# Altium PCB 皮肤热疗.PcbDoc
Units mil, origin at the board's own origin, x right, y up, seen from the top; angles counter-clockwise.
Board outline 1403.03 x 1893.03 mil, 2 copper layers (Top Layer, Bottom Layer); 64 components, 35 nets, 236 pads, 45 vias.
Unrouted connection lines stored in the file: 6.
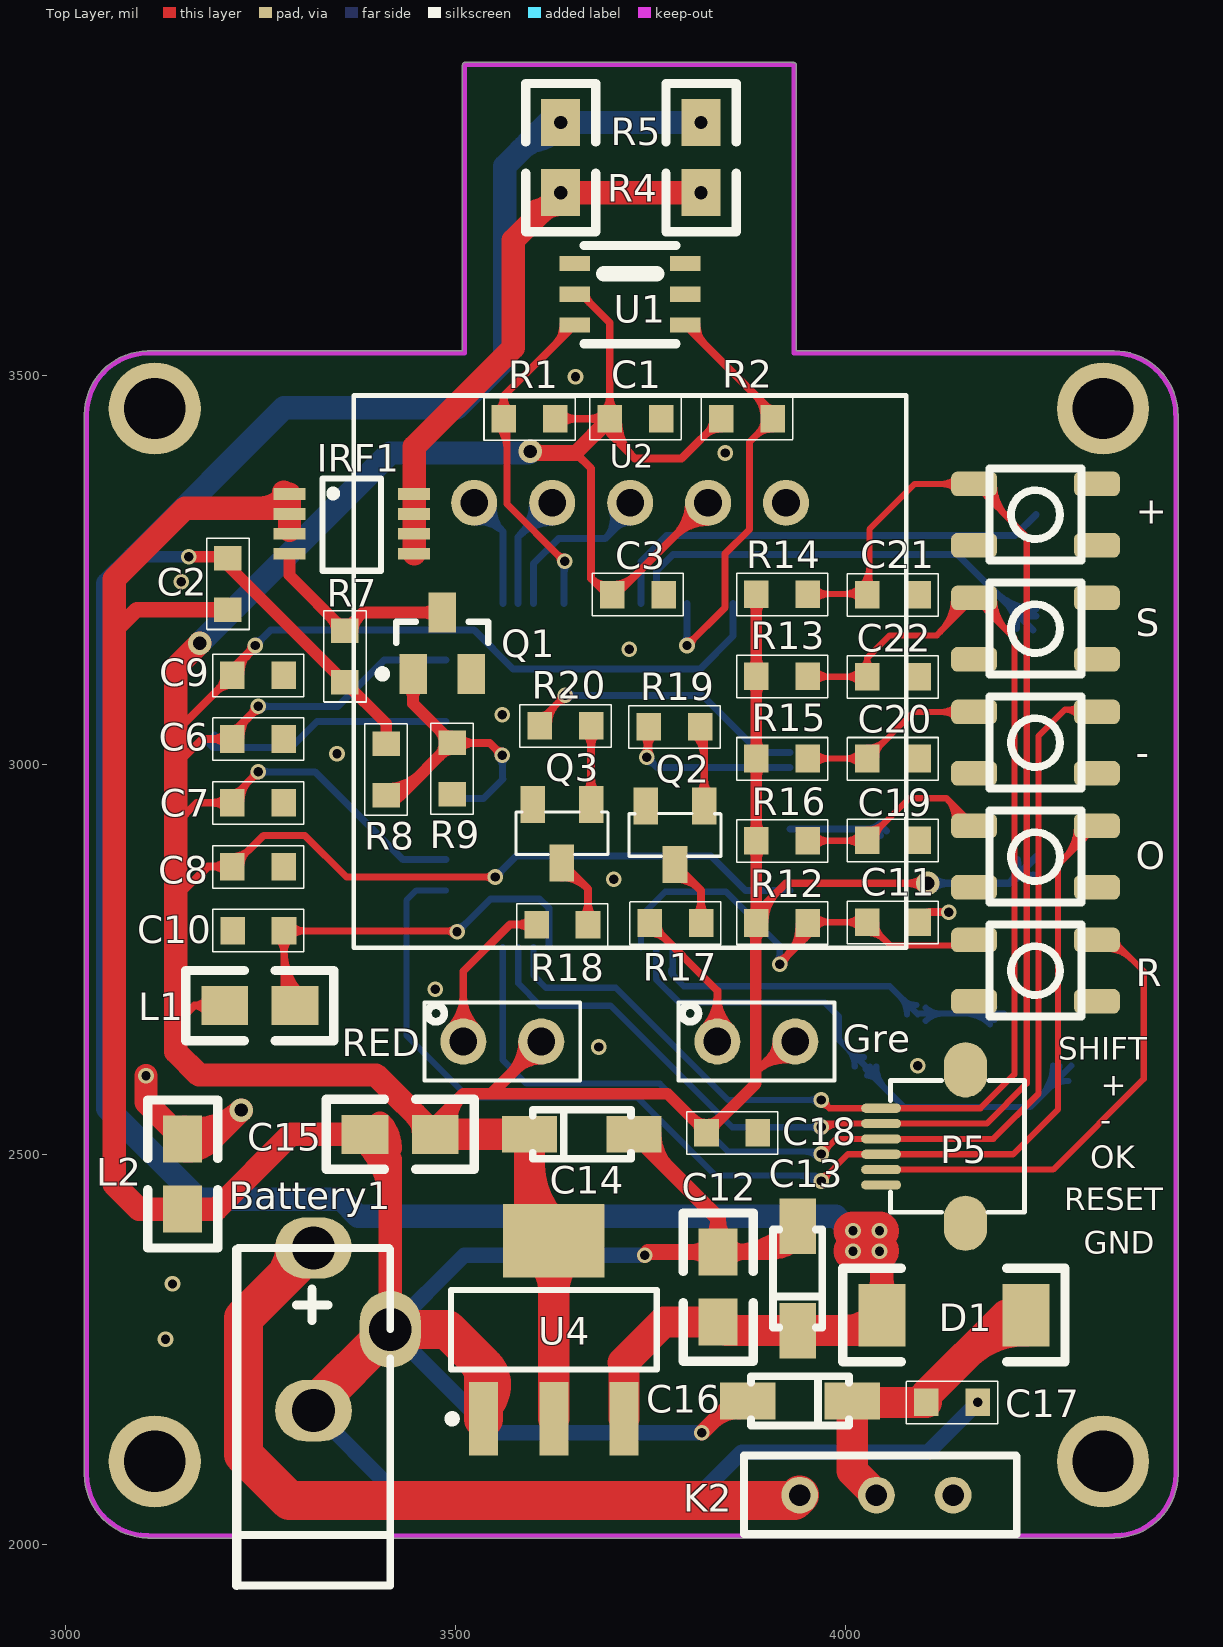
[diagram p0: Top Layer view]
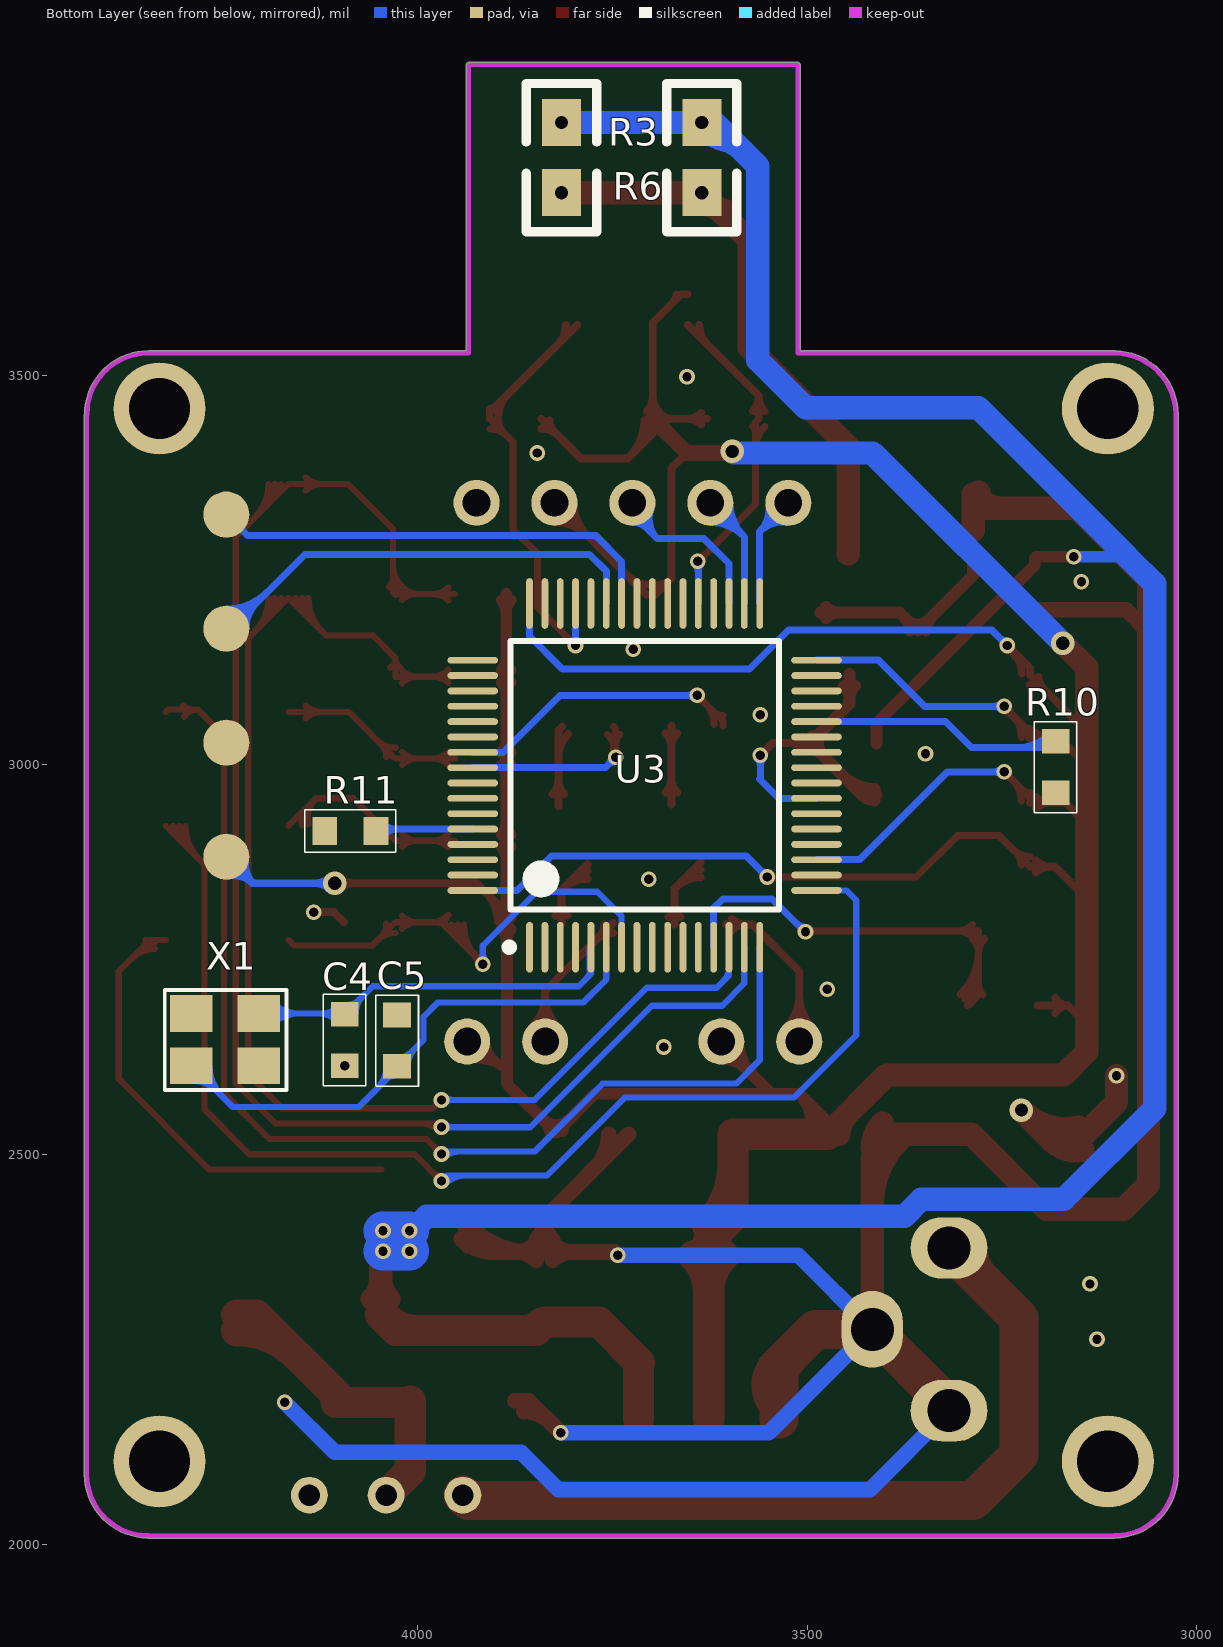
[diagram p1: Bottom Layer view, seen from below]

## Layer stack, top to bottom
Top Solder: solder mask 0.4, Solder Resist, Dk 3.5
Top Layer: signal copper 1.4
Dielectric1: dielectric 12.6, FR-4, Dk 4.8
Bottom Layer: signal copper 1.4
Bottom Solder: solder mask 0.4, Solder Resist, Dk 3.5

## Board outline
3023.99,2090 ccw(c3105.74,2090) 3104.49,2008.25 ccw(c3105.74,2011) 3105.74,2007.98 4345.26,2007.98 ccw(c4345.26,2011) 4346.51,2008.25 ccw(c4345.26,2090) 4427.02,2090 4427.02,3449.26 ccw(c4424,3449.26) 4426.75,3450.51 ccw(c4345,3449.26) 4345,3531.01 3937.01,3531.01 3937.01,3898 ccw(c3934,3898) 3933,3900.84 ccw(c3932,3898) 3932,3901.01 3512,3901.01 ccw(c3512,3898) 3508.99,3898 3508.99,3531.01 3105.74,3531.01 ccw(c3105.74,3528) 3104.49,3530.75 ccw(c3105.74,3449) 3023.99,3449

## Design rules (kind name [scope] priority, off if disabled: settings)
Clearance [All] p1: gap=7
HoleSize [All] p1: absolutevalues=TRUE maxlimit=500 minlimit=1 maxpercent=80.000 minpercent=20.000
MinimumSolderMaskSliver [All] p1: minsoldermaskwidth=0
PolygonConnect [All] p1: connectstyle=Relief reliefconductorwidth=10 reliefentries=4 polygonreliefangle="90 Angle" airgapwidth=10
RoutingVias [All] p1: holewidth=28 width=50 viastyle="Through Hole" minholewidth=28 minwidth=50 maxholewidth=28 maxwidth=50
SilkToSilkClearance [All] p1: silktosilkclearance=0
SilkToSolderMaskClearance [IsPad] p1: minsilkscreentomaskgap=0 clearancetoexposedcopper=TRUE
SolderMaskExpansion [All] p1: expansion=2
Width [All] p1: maxlimit=100 minlimit=8 preferedwidth=10
26 further rules are at their usual default settings.

## Classes and differential pairs
component class U_UI: + - C18 C19 C20 C21 C22 Green O Q2 Q3 R13 R14 R15 R16 R17 R18 R19 R20 RED S
component class U_Power: Battery1 C12 C13 C14 C15 C16 C17 D1 K2 U4
component class U_MCU: C4 C5 C6 C7 C8 C9 C10 C11 L1 R R10 R11 R12 U3 X1
component class U_LCD: C3 U2
component class U_Heater: C1 C2 IRF1 Q1 R1 R2 R3 R4 R5 R6 R7 R8 R9 U1
component class Top: L2 P5

## Components (designator, comment, footprint, x,y, rotation, side; value= is the part's Value field where it differs from the comment)
+ "按键" mini按键 4185,3380 r0 top (schematic designator K4)
- "按键" mini按键 4185,3087.5 r0 top (schematic designator K5)
Battery1 "CON3" J-SOURCE-micro 3436,2262 r270 top
C1 "Capacitor-0603" 0603 3698,3444 r0 top
C2 "Capacitor-0603" 0603 3208,3265 r270 top
C3 "Capacitor-0603" 0603 3701,3218 r0 top
C4 "Capacitor-0805" 0603 4093,2614 r90 bottom
C5 "Capacitor-0805" 0603 4026,2679 r270 bottom
C6 "Capacitor-0603" 0603 3279.85,3033.14 r180 top
C7 "Capacitor-0603" 0603 3279.85,2951.28 r180 top
C8 "Capacitor-0603" 0603 3279.85,2869.42 r180 top
C9 "Capacitor-0603" 0603 3279.85,3115 r180 top
C10 "Capacitor-0603" 0603 3214,2787 r0 top
C11 "Capacitor-0603" 0603 4094,2798 r180 top
C12 "Capacitor-0805" 0805 3837,2375 r270 top
C13 "电解电容" 钽电容1206（A3216） 3939,2278 r90 top
C14 "电解电容" 钽电容1206（A3216） 3599,2526 r0 top
C15 "Capacitor-0805" 0805 3384,2526 r0 top
C16 "电解电容" 钽电容1206（A3216） 4005,2184 r180 top
C17 "Capacitor-0603" 0603 4170,2182 r180 top
C18 "Capacitor-0603" 0603 3888,2528 r180 top
C19 "Capacitor-0603" 0603 4094,2903 r180 top
C20 "Capacitor-0603" 0603 4094,3008 r180 top
C21 "Capacitor-0603" 0603 4094,3218 r180 top
C22 "Capacitor-0603" 0603 4094,3113 r180 top
D1 "1N5817" 1808 4232,2294 r180 top
Gre "LED" 外插小灯 3936,2645 r180 top (schematic designator LED1)
IRF1 "IRF7601-1" IRF7601_Micro 3367,3308 r0 top
K2 "K400" SS-12D01-edit 4040,2063 r0 top
L1 "Inductor" 0805 3294,2691 r180 top
L2 "Inductor" 0805 3150,2520 r270 top
O "按键" mini按键 4185,2941.25 r0 top (schematic designator K6)
P5 "面板按键接口" 软排线插座6P-0.5mm 4046,2461 r90 top
Q1 "MOSFET_N" MOSFET_N 3483,3156 r90 top
Q2 "BC847" BC847B 3819,2947 r270 top
Q3 "BC847" BC847B 3674,2949 r270 top
R "按键" mini按键 4185,2795 r0 top (schematic designator K1)
R1 "Resistor-0603" 0603 3628,3444 r180 top
R2 "Resistor-0603" 0603 3841,3444 r0 top
R3 "Resistor-0805" 0805 3635,3734 r90 bottom
R4 "Resistor-0805" 0805 3635,3734 r90 top
R5 "Resistor-0805" 0805 3815,3734 r90 top
R6 "Resistor-0805" 0805 3815,3734 r90 bottom
R7 "Resistor-0603" 0603 3358,3172 r270 top
R8 "Resistor-0603" 0603 3411,2961 r90 top
R9 "Resistor-0603" 0603 3496,2962 r90 top
R10 "Resistor-0603" 0603 3181,2964 r90 bottom
R11 "Resistor-0603" 0603 4119,2915 r180 bottom
R12 "Resistor-0603" 0603 3952,2797 r180 top
R13 "Resistor-0603" 0603 3952,3113.5 r180 top
R14 "Resistor-0603" 0603 3952,3219 r180 top
R15 "Resistor-0603" 0603 3952,3008 r180 top
R16 "Resistor-0603" 0603 3952,2902.5 r180 top
R17 "Resistor-0603" 0603 3815,2797 r180 top
R18 "Resistor-0603" 0603 3670,2795 r180 top
R19 "Resistor-0603" 0603 3814,3049 r180 top
R20 "Resistor-0603" 0603 3674,3050 r180 top
RED "LED" 外插小灯 3610,2645 r180 top (schematic designator LED2)
S "按键" mini按键 4185,3233.75 r0 top (schematic designator K3)
U1 "SHIT21" SHT21 3653,3643 r0 top
U2 "0.49OLED" 0.49OLED 3724,3336 r0 top
U3 "STM32F103RBT6" STM32F103RBT6 3856,2766 r90 bottom
U4 "AMS1117-3.3" AMS1117-3.3(SOT-23) 3536,2161 r0 top
X1 "3225无源晶振" 3225无源晶振 4290,2614 r180 bottom

## Footprints (in the part's own frame and the unit in brackets; to place one, negate y for a bottom-side part, rotate by r counter-clockwise, add the part's x,y. Pads: shape width x height; smd on the part's side, far side on the other; paste and mask are expansions set on the pad)
0.49OLED [mm]
  round 1.5 hole 0.9: 1(5.08,0) 2(2.54,0) 3(0,0) 4(-2.54,0) 5(-5.08,0)
  silkscreen extent -9,-14.5 9,3.5
0603 [mm] "0603"
  rect 0.8x0.9 smd: 1(0,0) 2(1.676,0)
  silkscreen extent -0.65,-0.69 2.32,0.7, body extent 0.1,-0.4 1.7,0.4, height 0.5
0805 [mil]
  rect 60x50 smd: 1(0,0) 2(90,0)
  silkscreen extent -50,-45 140,45
1808 [mil]
  rect 60x80 smd: 1(0,0) 2(185,0)
  silkscreen extent -50,-60 235,60
3225无源晶振 [mm]
  rect 1.4x1.2 smd: 1(0,0) 2(2.2,0) 3(2.2,1.7) 4(0,1.7)
  silkscreen extent -0.86,-0.79 3.1,2.46
AMS1117-3.3(SOT-23) [mm]
  rect 0.95x2.4 smd: 1(0,0) 2(2.29,0) 3(4.58,0)
  rect 3.3x2.4 smd: 2(2.29,5.8)
  silkscreen extent -1.15,-0.12 5.65,4.2, body extent -1.06,1.04 5.65,4.75, height 1.8
BC847B [mm] "SOT23, 3-Leads, Body 2.90x2.45mm, Pitch 0.95mm, IPC Medium Density"
  rect 1.2x0.8 smd: 1(0,-1.9) 2(0,0) 3(1.9,-0.95)
  silkscreen extent 0.24,-2.45 1.63,0.55, body extent 0.25,-2.45 1.65,0.55, height 1.1
IRF7601_Micro [mm]
  rect 1.04x0.38 smd: 1(-2.032,1) 2(-2.032,0.35) 3(-2.032,-0.3) 4(-2.032,-0.95) 5(2.032,-0.95) 6(2.032,-0.3) 7(2.032,0.35) 8(2.032,1)
  silkscreen extent -0.95,-1.5 0.95,1.5
J-SOURCE-micro [mm]
  oval 2.5x2 hole 1.4: 1(-0.35,-0.5)
  oval 2x2.5 hole 1.4: 2(2.3,-3) 3(-3,-3)
  silkscreen extent -3,-5.5 8,-0.5
mini按键 [mm]
  rrect50% 1.5x0.8 smd: 1(-0.5,-0.5) 1(3.5,-0.5) 2(-0.5,-2.5) 2(3.5,-2.5)
  silkscreen extent 0,-3 3,0
MOSFET_N [mm]
  rect 1.3x0.9 smd: 1(-1,0.95) 2(-1,-0.95) 3(1,0)
  silkscreen extent -1.12,-1.5 0.7,2.07, body extent -0.7,-1.52 0.7,1.52, height 1.1
SHT21 [mm]
  rect 1x0.5 smd: 1(0,0) 2(3.6,0) 3(0,-1) 4(3.6,-1) 5(0,-2) 6(3.6,-2)
  silkscreen extent 0.3,-2.62 3.3,0.58
SS-12D01-edit [mm]
  round 1.2 hole 0.7: 1(-2.5,0) 2(0,0) 3(2.5,0)
  silkscreen extent -4.32,-1.27 4.57,1.29
STM32F103RBT6 [mm]
  oval 1.65x0.22 smd: 1(0,0) 2(0,-0.5) 3(0,-1) 4(0,-1.5) 5(0,-2) 6(0,-2.5) 7(0,-3) 8(0,-3.5) 9(0,-4) 10(0,-4.5) 11(0,-5) 12(0,-5.5) 13(0,-6) 14(0,-6.5) 15(0,-7) 16(0,-7.5) 33(11.2,-7.5) 34(11.2,-7) 35(11.2,-6.5) 36(11.2,-6) 37(11.2,-5.5) 38(11.2,-5) 39(11.2,-4.5) 40(11.2,-4) 41(11.2,-3.5) 42(11.2,-3) 43(11.2,-2.5) 44(11.2,-2) 45(11.2,-1.5) 46(11.2,-1) 47(11.2,-0.5) 48(11.2,0)
  oval 0.22x1.65 smd: 17(1.85,-9.35) 18(2.35,-9.35) 19(2.85,-9.35) 20(3.35,-9.35) 21(3.85,-9.35) 22(4.35,-9.35) 23(4.85,-9.35) 24(5.35,-9.35) 25(5.85,-9.35) 26(6.35,-9.35) 27(6.85,-9.35) 28(7.35,-9.35) 29(7.85,-9.35) 30(8.35,-9.35) 31(8.85,-9.35) 32(9.35,-9.35) 49(9.35,1.85) 50(8.85,1.85) 51(8.35,1.85) 52(7.85,1.85) 53(7.35,1.85) 54(6.85,1.85) 55(6.35,1.85) 56(5.85,1.85) 57(5.35,1.85) 58(4.85,1.85) 59(4.35,1.85) 60(3.85,1.85) 61(3.35,1.85) 62(2.85,1.85) 63(2.35,1.85) 64(1.85,1.85)
  silkscreen extent -0.12,-8.13 9.97,0.78, body extent 0.6,-8.75 10.6,1.25, height 1.6
外插小灯 [mm]
  round 1.5 hole 0.9: 1(0,0) 2(2.54,0)
  silkscreen extent -1.27,-1.27 3.81,1.27
软排线插座6P-0.5mm [mm]
  oval 1.8x1.4 smd mask+0.051: 0(-1.25,-2.75) 0(3.75,-2.75)
  oval 0.3x1.3 smd mask+0.051: 1(0,0) 2(0.5,0) 3(1,0) 4(1.5,0) 5(2,0) 6(2.5,0)
  silkscreen extent -0.89,-4.67 3.4,-0.3
钽电容1206（A3216） [mm]
  rect 1.8x1.2 smd: 1(3.3,0) 2(-0.1,0)
  silkscreen extent 0,-0.8 3.2,0.8

## Part data
Battery1: "Connector"
C4 C5: library part Capacitor-0
D1: library part "DIODE SCHOTTKY", "Schottky Diode"
IRF1: library part Component_1, "IRF7601"
K2: library part CON3, "Connector"
P5: library part "Header 6", "Header, 6-Pin"

## Free pads (board coordinates)
  round 59.06 smd far side: 0(4245,3321) 1(4245,3174.67) 2(4245,3028.33) 3(4245,2882)
  round 118.11 hole 78.74: 0(4330.71,2106.3) 1(3114.17,2106.3) 1(3114.17,3457) 1(4330.71,3457)

## Via types
v1: diameter 20, hole 12, Top Layer to Bottom Layer, 37 vias
v2: diameter 30, hole 17, Top Layer to Bottom Layer, 8 vias

## Nets (pads, with @x,y where several pads share a name; then routed paths per layer and width w, separated by ;. In a path a pad name is that pad's centre, name@x,y a point inside that pad or via, vN(x,y) a via of type N, cw(c..) or ccw(c..) an arc to the next point about the centre after c; other vN are vias at no path point)
AGND: Battery1.1 Battery1.2 C2.2 C12.1 C13.1 C14.1 C15.1 C16.1 C17.1 IRF1.1 IRF1.2 IRF1.3 L2.2 U4.1 | length 5317.6
  Top Layer w20: 3062,3170 3091,3199 C2.2 ; C14.1 3837,2417.92 C12.1 ; 3752.66,2375 ccw(c3752.66,2361.34) v1(3743,2371) 3747,2375 C12.1 ; C14.1@3754.35,2526 ccw(c3815.76,2526) 3772.34,2482.58 ; v1(3816,2143) 3857,2184 C16.1 ; C12.1@3826.39,2364.39 ccw(c3800.79,2338.79) 3800.79,2375 ccw(c3800.79,2411.21) C12.1@3826.39,2385.61 ; C12.1@3826.39,2390.61 ccw(c3800.79,2416.21) 3837,2416.21 ccw(c3873.21,2416.21) C12.1@3847.61,2390.61 ; 3829.31,2156.31 cw(c3863.27,2122.36) C16.1@3863.27,2170.38 ; C12.1@3847.61,2364.39 cw(c3873.21,2338.79) 3873.21,2375 cw(c3873.21,2411.21) C12.1@3847.61,2385.61 ; C12.1@3855.15,2375 ccw(c3855.15,2479.96) C13.1@3929.37,2405.74 ; 3903.43,2375 ccw(c3903.43,2431.68) C13.1@3943.51,2391.6 ; C13.1@3935.52,2382.94 ccw(c3927.7,2353.38) 3906.08,2375 ; C13.1 3906.08,2375 ; C12.1 3906.08,2375
  Top Layer w30: 3247.81,3329 ccw(c3247.81,3373.56) IRF1.1@3279.33,3342.05 ; IRF1.2@3274.73,3329 cw(c3274.73,3322.5) IRF1.2@3279.33,3327.1 ; IRF1.1@3279.92,3349.91 ccw(c3304.36,3341.14) IRF1.2@3286,3322.78 ; IRF1.3@3287,3301.1 IRF1.2 ; C15.1@3381.93,2518.93 cw(c3298.91,2435.91) 3416.32,2435.91 ; C15.1@3387.75,2516.08 cw(c3383.67,2483.69) 3416.32,2483.69 ; C15.1@3399,2526 ccw(c3435.21,2526) 3409.61,2500.39 ; C15.1@3403.14,2540.14 cw(c3371.34,2508.34) 3416.32,2508.34 ; Battery1.1 3416.32,2493.68 C15.1 3289,2526 3193,2430 L2.2 3094,2430 3062,2462 3062,3170 3062,3238 3153,3329 3279.78,3329 IRF1.2@3286,3322.78 ; IRF1.2@3286,3322.78 IRF1.2 ; IRF1.2@3286,3322.78 3286,3320.78 IRF1.2 ; IRF1.2@3286,3322.78 3286,3346.37 IRF1.1 IRF1.2
  Top Layer w50: Battery1.2 3317.89,2177.35 Battery1.1 3489.22,2275.78 3536,2229 ; 3518.85,2246.15 cw(c3462.25,2189.54) U4.1@3542.3,2189.54 ; U4.1 3536,2229 ; U4.1@3541.43,2186.35 ccw(c3511.17,2204.17) 3536,2229
  Bottom Layer w20: Battery1.2 3419.34,2070 3819,2070 3867,2118 4106,2118 v1(4170,2182) ; v1(3743,2371) 3511.54,2371 Battery1.1 3549.1,2143 v1(3816,2143)
BOOT0: R11.2 U3.60 | length 167.9
  Bottom Layer w9: U3.60 4050.43,2917.57 R11.2 ; 4024.38,2917.57 cw(c4024.38,2888.35) R11.2@4045.05,2909.01 ; 4027.31,2917.57 ccw(c4027.31,2942.66) R11.2@4045.05,2924.92
BOOT1: R10.2 U3.28 | length 392.5
  Bottom Layer w9: R10.2 3189,3022 3289,3022 3322.37,3055.37 U3.28 ; R10.2@3184.56,3031.59 ccw(c3207.71,3054.74) 3207.71,3022 ; R10.2@3190.92,3037.95 ccw(c3229.44,3076.47) 3229.44,3022
GND: +.2 -.2 C1.2 C3.2 C4.1 C5.1 C6.1 C7.1 C8.1 C9.1 C10.1 C11.1 C18.1 C19.1 C20.1 C21.1 C22.1 L2.1 O.2 P5.1 pad.2 Q1.2 Q2.1 Q3.1 R9.1 R10.1 R11.1 R.2 S.2 U1.4 U2.1 U3.12 U3.18 U3.31 U3.47 U3.63 X1.2 X1.4 | length 357.3
  Top Layer w10: C11.1 4107,2811 v1(4133,2811)
  Top Layer w30: v1(3103,2601) 3103,2567 L2.1 3188,2520 v2(3225,2557) cw(c3167.7,2614.3) L2.1@3151.94,2534.81 ; L2.1@3146.11,2505.38 ccw(c3154.56,2548) 3185.28,2517.28
  other v1: 3128,2263 3137,2334 4093,2614 3684,2638 3474,2712 3703,2853 3348,3014 3560,3064 3723,3148 3148,3235 3846,3400 3654,3498
INT_1: C22.2 P5.6 R13.1 S.1 U3.14 | length 2022.3
  Top Layer w8: R13.1 3952.5,3113 C22.2 4028,3137 ; R13.1@3960.31,3105.19 cw(c3979.16,3086.34) 3979.16,3113 ; R13.1@3960.31,3121.81 ccw(c3981.57,3143.07) 3981.57,3113 ; v1@3969,2564 cw(c3969,2549.51) 3979.24,2559.76 cw(c3989.49,2570) v1@3975,2570 ; v1(3969,2570) 3979.57,2559.43 P5.6 4173.43,2559.43 4217,2603 4217,3162.38 4165.31,3214.07 4117.25,3166 4057,3166 4028,3137 ; C22.2@4019.69,3104.69 ccw(c3999.64,3084.64) 3999.64,3113 ccw(c3999.64,3141.36) C22.2@4019.69,3121.31 ; C22.2@4021.45,3124.72 ccw(c4013.22,3137) 4028,3137 ; C22.2@4034.55,3124.72 cw(c4042.78,3137) 4028,3137 ; 4121.74,3170.49 ccw(c4078.16,3214.07) S.1@4139.79,3214.07 ; 4135.39,3184.14 ccw(c4105.47,3214.07) S.1@4147.79,3214.07 ; 4149.05,3197.8 ccw(c4132.79,3214.07) S.1@4155.79,3214.07 ; S.1@4174.84,3214.07 ccw(c4197.84,3214.07) 4181.58,3197.8 ; S.1@4182.84,3214.07 ccw(c4225.16,3214.07) 4195.24,3184.14 ; S.1@4190.84,3214.07 ccw(c4252.47,3214.07) 4208.89,3170.49
  Bottom Layer w8: U3.14 3600.09,2729.91 3616,2714 3705.44,2714 3849.44,2570 v1(3969,2570) ; U3.14@3600.43,2737.85 ccw(c3620.4,2737.85) 3606.28,2723.72 ; v1@3964.76,2565.76 ccw(c3954.51,2555.51) 3954.51,2570 ccw(c3954.51,2584.49) v1@3964.76,2574.24
INT_2: +.1 C21.2 P5.5 R14.1 U3.15 | length 2254.9
  Top Layer w8: R14.1 4027,3219 C21.2 4031,3221 4031,3302 4089.32,3360.32 4165.31,3360.32 4233,3292.63 4233,2591.16 4181.58,2539.74 P5.5 3973.41,2539.74 v1(3969,2535.33) ; R14.1@3960.31,3210.69 cw(c3980.36,3190.64) 3980.36,3219 cw(c3980.36,3247.36) R14.1@3960.31,3227.31 ; v1@3973.24,2531.09 cw(c3994.12,2510.21) 3994.12,2539.74 ; 3997.3,3219 ccw(c3997.3,3250.67) 4019.69,3228.28 ccw(c3992.4,3255.57) 4031,3255.57 ; 4001.98,3219 cw(c4001.98,3193.94) C21.2@4019.69,3211.66 ; C21.2@4025.35,3222.62 ccw(c4011.71,3236.26) 4031,3236.26 ; 4031,3241.09 ccw(c4049.12,3241.09) C21.2@4036.31,3228.28 ; +.1@4143.23,3352.01 ccw(c4123.17,3331.95) 4123.17,3360.32 ccw(c4123.17,3388.68) +.1@4143.23,3368.62 ; +.1@4174.84,3360.32 ccw(c4197.84,3360.32) 4181.58,3344.05 ; +.1@4182.84,3360.32 ccw(c4225.16,3360.32) 4195.24,3330.39 ; +.1@4190.84,3360.32 ccw(c4252.47,3360.32) 4208.89,3316.74
  Bottom Layer w8: U3.15 3580.41,2719.59 3609,2691 3699,2691 3855,2535 v1@3969,2535 ; 3953.71,2535 ccw(c3953.71,2550.62) v1@3964.76,2539.58 ; 3955.32,2535 cw(c3955.32,2521.65) v1@3964.76,2531.09
INT_3: -.1 C20.2 P5.4 R15.1 U3.16 | length 1956.5
  Top Layer w8: R15.1 C20.2 4087.82,3067.82 -.1@4165.31,3067.82 ; R15.1@3960.31,2999.69 cw(c3980.36,2979.64) 3980.36,3008 cw(c3980.36,3036.36) R15.1@3960.31,3016.31 ; v1(3969,2500.67) 3988.39,2520.05 P5.4 4189.73,2520.05 4248,2578.32 4248,3037 4282,3071 ; v1@3969,2506.67 ccw(c3969,2521.15) 3979.24,2510.91 ccw(c3989.49,2500.67) v1@3975,2500.67 ; C20.2@4019.69,2999.69 ccw(c3999.64,2979.64) 3999.64,3008 ccw(c3999.64,3036.36) C20.2@4019.69,3016.31 ; C20.2@4028,3021.72 ccw(c4028,3054.83) 4051.42,3031.42 ; C20.2@4039.75,3009.97 cw(c4063.36,3009.97) 4046.66,3026.66 ; -.1@4143.23,3059.51 ccw(c4123.17,3039.45) 4123.17,3067.82 ccw(c4123.17,3096.18) -.1@4143.23,3076.12 ; 4288.34,3071 ccw(c4288.34,3088.49) -.1@4300.71,3076.12 ; -.1@4299.07,3061.57 ccw(c4282,3050.85) 4282,3071 ; -.1@4322.8,3067.82 4319.61,3071 4282,3071
  Bottom Layer w8: U3.16 3560.72,2621.28 3591,2591 3762,2591 3849,2504 3965.67,2504 v1(3969,2500.67) ; 3946.47,2504 cw(c3946.47,2478.13) v1@3964.76,2496.42
INT_4: C19.2 O.1 P5.3 R16.1 U3.17 | length 2179.1
  Top Layer w8: R16.1 4027.5,2902.5 C19.2 4082,2957 4129.88,2957 ; R16.1@3960.31,2894.19 cw(c3980.36,2874.14) 3980.36,2902.5 cw(c3980.36,2930.86) R16.1@3960.31,2910.81 ; v1(3969,2466) 4003.37,2500.37 P5.3 4215.37,2500.37 4273,2558 4273,2871.77 O.1@4322.8,2921.57 ; v1@3969,2472 ccw(c3969,2486.49) 3979.24,2476.24 ccw(c3989.49,2466) v1@3975,2466 ; 3998.43,2902.5 ccw(c3998.43,2932.57) C19.2@4019.69,2911.31 ; 4000.84,2902.5 cw(c4000.84,2875.84) C19.2@4019.69,2894.69 ; C19.2@4028,2916.72 ccw(c4028,2949.83) 4051.42,2926.42 ; C19.2@4039.75,2904.97 cw(c4063.36,2904.97) 4046.66,2921.66 ; O.1@4140.01,2923.82 ccw(c4103.78,2930.9) 4129.88,2957 ; 4140.51,2946.37 cw(c4121.56,2927.43) O.1@4147.86,2922.28 ; O.1@4165.31,2921.57 4129.88,2957 ; 4279.22,2877.99 ccw(c4235.64,2921.57) O.1@4297.27,2921.57 ; 4292.87,2891.64 ccw(c4262.95,2921.57) O.1@4305.27,2921.57 ; 4306.53,2905.3 ccw(c4290.27,2921.57) O.1@4313.27,2921.57
  Bottom Layer w8: U3.17 3449.83,2838.83 3437,2826 3437,2653 3517,2573 3734,2573 3834,2473 3962,2473 v1(3969,2466) ; 3937.62,2473 cw(c3937.62,2434.62) v1@3964.76,2461.76 ; 3956.93,2473 cw(c3956.93,2453.93) v1@3970.41,2467.41
NetBattery1_3: Battery1.3 K2.1 | length 1089.2
  Top Layer w50: 3276.56,2338.78 ccw(c3235.22,2380.11) Battery1.3@3293.68,2380.11 ; Battery1.3 3228,2290.22 3228,2115 3287,2056 3934.57,2056 K2.1
NetC4_2: C4.2 U3.5 X1.3 | length 710.4
  Bottom Layer w8: U3.5 3778.61,2764.65 3778.61,2730.26 ; U3.5@3777.55,2737.69 ccw(c3783.04,2734.68) 3778.61,2730.26 ; U3.5@3777.59,2737.85 ccw(c3793.45,2737.85) 3782.24,2726.64 ; 4069.58,2703.42 cw(c4046.17,2680) C4.2@4079.28,2680 ; 4074.34,2698.66 ccw(c4091.03,2715.36) C4.2@4091.03,2691.75 ; C4.2@4103.28,2671.69 cw(c4125.57,2649.39) 4125.57,2680.93 ; C4.2@4103.28,2688.31 ccw(c4121.09,2706.12) 4121.09,2680.93 ; X1.3@4185.57,2667.05 ccw(c4152.08,2633.56) 4152.08,2680.93 ccw(c4152.08,2728.3) X1.3@4185.57,2694.8 ; X1.3@4191.23,2672.71 ccw(c4171.39,2652.87) 4171.39,2680.93 ccw(c4171.39,2708.99) X1.3@4191.23,2689.15 ; X1.3 4093.93,2680.93 C4.2 4057,2716 3792.87,2716 3778.61,2730.26
NetC5_2: C5.2 U3.6 X1.1 | length 892.5
  Bottom Layer w8: U3.6 3757.57,2724.43 3787,2695 3974,2695 3992,2677 3992,2647 C5.2 4026,2610 4075,2561 4237,2561 X1.1 ; 4002.58,2636.42 cw(c3979.17,2613) C5.2@4012.28,2613 ; 4007.34,2631.66 ccw(c4024.03,2648.36) C5.2@4024.03,2624.75 ; C5.2@4027.97,2601.25 cw(c4027.97,2584.88) 4039.54,2596.46 ; C5.2@4031.72,2613 ccw(c4052.76,2613) C5.2@4037.88,2598.12 ; C5.2@4039.72,2613 ccw(c4080.07,2613) 4051.54,2584.46 ; 4249.78,2573.78 ccw(c4209.56,2614) X1.1@4266.44,2614 ; 4259.29,2583.29 cw(c4286.06,2556.51) X1.1@4286.06,2594.38 ; 4263.44,2587.44 ccw(c4236.88,2614) X1.1@4274.44,2614
NetC10_2: C10.2 L1.1 U3.13 | length 794.5
  Top Layer w9: C10.2@3272.05,2777.08 cw(c3252.84,2757.88) 3280,2757.88 cw(c3307.16,2757.88) C10.2@3287.95,2777.08 ; L1.1@3274.5,2705.5 ccw(c3261.24,2718.76) 3280,2718.76 ccw(c3316.76,2718.76) L1.1@3290.77,2692.77 ; 3280,2740.49 ccw(c3338.49,2740.49) L1.1@3297.13,2699.13 ; 3280,2762.22 ccw(c3360.22,2762.22) L1.1@3303.5,2705.5 ; C10.2@3287.95,2779.05 cw(c3307.16,2759.84) 3307.16,2787 cw(c3307.16,2814.16) C10.2@3287.95,2794.95 ; L1.1 3280,2705 C10.2 3501,2787 v1(3502,2786) ; 3486.31,2787 cw(c3486.31,2770.31) v1@3498.11,2782.11 ; 3491.14,2787 ccw(c3491.14,2796.86) v1@3498.11,2789.89
  Bottom Layer w9: v1@3502,2785 3545,2828 3608,2828 3619.78,2816.22 U3.13 ; v1@3502,2791.5 ccw(c3502,2807.19) 3513.1,2796.1 ; v1@3507.5,2786 cw(c3518.36,2786) 3510.68,2793.68
NetC16_2: C16.2 C17.2 D1.1 K2.2 | length 497
  Top Layer w40: K2.2 4008.94,2094.06 C16.2 4010.94,2182 C17.2 4104,2191.89 4206.11,2294 D1.1 ; 4153.66,2241.55 cw(c4232,2163.21) D1.1@4232,2274
NetIRF1_4: IRF1.4 Q1.3 R7.1 | length 364
  Top Layer w15: IRF1.4 3287,3243 R7.1 3381.37,3195.37 Q1.3 ; 3340.56,3189.44 cw(c3323.12,3172) R7.1@3347.78,3172 ; R7.1@3345.31,3184.69 ccw(c3356.03,3195.41) R7.1@3356.03,3180.25 ; R7.1@3359.97,3180.25 ccw(c3359.97,3195.41) R7.1@3370.69,3184.69 ; R7.1@3368.22,3172 cw(c3392.88,3172) 3375.44,3189.44 ; Q1.3@3475.78,3188.15 ccw(c3458.34,3170.71) 3458.34,3195.37 ccw(c3458.34,3220.03) Q1.3@3475.78,3202.59
NetIRF1_5: IRF1.5 IRF1.6 IRF1.7 IRF1.8 R3.1 R4.1 R5.1 R6.1 | length 788.6
  Top Layer w30: IRF1.5 IRF1.6 IRF1.7 IRF1.8 3447,3408 3574,3535 3574,3673 v2(3635,3734) ; 3604.96,3710.95 ccw(c3592.16,3758.73) v2(3635,3734) ; 3609.39,3708.39 cw(c3635,3682.79) R4.1@3635,3719 ; v2(3815,3734) v2(3635,3734)
NetLED1_2: Gre.2 R17.2 | length 376.9
  Top Layer w10: R17.2@3749,2784.28 cw(c3749,2753.58) 3770.71,2775.29 ; R17.2 3836,2710 Gre.2 ; R17.2@3759.75,2795.03 ccw(c3780.94,2795.03) 3765.96,2780.04 ; Gre.2@3818.66,2662.34 ccw(c3776.79,2704.21) 3836,2704.21 ccw(c3895.21,2704.21) Gre.2@3853.34,2662.34 ; Gre.2@3825.73,2655.27 ccw(c3800.93,2680.07) 3836,2680.07 ccw(c3871.07,2680.07) Gre.2@3846.27,2655.27
NetLED2_2: R18.2 RED.2 | length 397.7
  Top Layer w10: RED.2@3492.66,2662.34 ccw(c3450.79,2704.21) 3510,2704.21 ccw(c3569.21,2704.21) RED.2@3527.34,2662.34 ; RED.2@3499.73,2655.27 ccw(c3474.93,2680.07) 3510,2680.07 ccw(c3545.07,2680.07) RED.2@3520.27,2655.27 ; RED.2 3510,2735 3570,2795 R18.2 ; R18.2@3596.4,2787.4 ccw(c3578.05,2769.05) 3578.05,2795 ccw(c3578.05,2820.95) R18.2@3596.4,2802.6
NetQ1_1: Q1.1 R8.1 R9.2 U3.23 | length 674.1
  Top Layer w10: R9.2 3544,3028 v1(3560,3012) ; R9.2@3505.57,3020.4 cw(c3523.92,3002.05) 3523.92,3028 cw(c3523.92,3053.95) R9.2@3505.57,3035.6 ; v1@3555,3012 ccw(c3542.93,3012) 3551.46,3020.54 ccw(c3560,3029.07) v1@3560,3017
  Top Layer w15: R8.1 3429,2961 ; R8.1@3412.97,2954.25 ccw(c3412.97,2976.65) 3428.81,2960.81 ; R8.1@3412.97,2969.25 ccw(c3412.97,3027.86) 3454.42,2986.42 ; R8.1@3419.68,2956.2 cw(c3429,2949.54) 3429,2961 ; R8.1@3419.68,2965.8 ccw(c3429,2972.46) 3429,2961 ; Q1.1@3438.37,3101.53 cw(c3420.93,3084.09) 3445.6,3084.09 cw(c3470.26,3084.09) Q1.1@3452.82,3101.53 ; Q1.1 3445.6,3078.4 R9.2 3429,2961 ; 3478.56,3010.56 ccw(c3461.12,3028) 3485.78,3028 ccw(c3461.12,3028) 3478.56,3045.44 ; R9.2@3483.31,3015.31 cw(c3494.03,3004.59) R9.2@3494.03,3019.75 ; R9.2@3483.31,3040.69 ccw(c3494.03,3051.41) R9.2@3494.03,3036.25
  Bottom Layer w9: U3.23 3535.94,2956.94 3561,2982 3560,2983 v1(3560,3012) ; v1@3556.11,3008.11 cw(c3546.72,2998.72) 3560,2998.72 cw(c3573.28,2998.72) v1@3563.89,3008.11
NetQ2_2: Q2.2 R19.1 | length 178.6
  Top Layer w10: R19.1@3806.4,3039.43 cw(c3775.98,3009.01) 3819,3009.01 ; Q2.2@3811.4,2962.47 ccw(c3793.05,2980.82) 3819,2980.82 ccw(c3844.95,2980.82) Q2.2@3826.6,2962.47 ; R19.1 3819,3044 Q2.2
NetQ2_3: Q2.3 R17.1 | length 181.4
  Top Layer w10: Q2.3@3781.6,2853.57 cw(c3781.6,2808.62) 3813.39,2840.41 ; Q2.3@3781.6,2863.57 cw(c3781.6,2842.76) Q2.3@3796.32,2857.48 ; Q2.3 3815,2838.8 R17.1 ; R17.1@3807.4,2806.57 ccw(c3789.05,2824.92) 3815,2824.92 ccw(c3840.95,2824.92) R17.1@3822.6,2806.57
NetQ3_2: Q3.2 R20.1 | length 182.5
  Top Layer w10: Q3.2@3666.4,2964.47 ccw(c3648.05,2982.82) 3674,2982.82 ccw(c3699.95,2982.82) Q3.2@3681.6,2964.47 ; R20.1@3666.4,3040.43 cw(c3648.05,3022.08) 3674,3022.08 cw(c3699.95,3022.08) R20.1@3681.6,3040.43 ; Q3.2 R20.1
NetQ3_3: Q3.3 R18.1 | length 185.4
  Top Layer w10: Q3.3@3636.6,2855.57 cw(c3636.6,2810.62) 3668.39,2842.41 ; Q3.3@3636.6,2865.57 cw(c3636.6,2844.76) Q3.3@3651.32,2859.48 ; Q3.3 3670,2840.8 R18.1 ; R18.1@3662.4,2804.57 ccw(c3644.05,2822.92) 3670,2822.92 ccw(c3695.95,2822.92) R18.1@3677.6,2804.57
NetR1_2: R1.2 U1.5 U3.37 | length 580.8
  Top Layer w9: R1.2@3554.05,3434.08 cw(c3525.12,3405.15) 3566.03,3405.15 ; R1.2 3566.03,3439.97 3566.03,3334.54 3639.56,3261 v1(3640,3261) ; 3566.03,3424.6 cw(c3579.43,3424.6) R1.2@3569.95,3434.08 ; 3629.87,3270.7 ccw(c3640,3280.83) v1@3640,3266.5 ; 3630.92,3269.64 cw(c3622.27,3261) v1@3634.5,3261
  Top Layer w10: R1.2@3554.4,3453.57 ccw(c3536.05,3471.92) 3562,3471.92 ccw(c3587.95,3471.92) R1.2@3569.6,3453.57 ; R1.2 3562,3473.26 U1.5 ; 3627.93,3539.19 ccw(c3602.86,3564.26) U1.5@3638.31,3564.26
  Bottom Layer w9: v1@3636.11,3257.11 cw(c3628.01,3249.01) 3639.46,3249.01 ; U3.37 v1@3639.46,3260.46 ; 3639.46,3246.43 cw(c3654.57,3246.43) v1@3643.89,3257.11
  Bottom Layer w10: v1@3639.46,3260.46 v1(3640,3261)
NetR2_2: R2.2 U1.6 U3.45 | length 710.3
  Top Layer w9: v1(3797,3153) 3846,3202 3846,3271 3877,3302 3877,3414 R2.2 ; v1@3797,3158.5 ccw(c3797,3171.78) 3806.39,3162.39 ccw(c3815.78,3153) v1@3802.5,3153 ; 3884.44,3421.44 cw(c3907,3398.88) R2.2@3907,3430.78 ; 3889.19,3426.19 ccw(c3873.35,3442.03) R2.2@3895.75,3442.03
  Top Layer w10: U1.6 3907,3451.99 R2.2 ; U1.6@3809.42,3564.26 ccw(c3844.87,3564.26) 3819.8,3539.19 ; 3884.39,3474.6 cw(c3855.76,3445.97) R2.2@3896.25,3445.97 ; R2.2@3898.93,3460.06 ccw(c3907,3468.12) R2.2@3907,3456.72
  Bottom Layer w9: v1@3793.11,3156.89 ccw(c3783.86,3166.14) 3796.94,3166.14 ; 3796.94,3166.41 ccw(c3810.41,3166.41) v1@3800.89,3156.89 ; U3.45 3796.94,3153.06 v1(3797,3153)
NetR19_2: R19.2 U3.56 | length 334.6
  Top Layer w9: R19.2@3740.05,3039.08 cw(c3726.88,3025.91) 3745.5,3025.91 ; v1@3741.61,3013.39 ccw(c3732.22,3022.78) 3745.5,3022.78 ccw(c3758.78,3022.78) v1@3749.39,3013.39 ; v1@3742.75,3014.26 ccw(c3738.03,3022.44) 3747.15,3020 ; v1(3745.5,3009.5) 3745.5,3046.5 R19.2 ; v1@3745.5,3013.84 cw(c3781.19,3013.84) R19.2@3755.95,3039.08 ; 3748.55,3025.24 ccw(c3765.08,3020.81) v1@3750.26,3012.25
  Bottom Layer w9: v1@3745.5,3004 cw(c3745.5,2990.72) 3754.89,3000.11 cw(c3764.28,3009.5) v1@3751,3009.5 ; v1(3745.5,3009.5) 3758.68,2996.32 U3.56
NetR20_2: R20.2 U3.55 | length 455.1
  Top Layer w9: R20.2 3608,3056 v1(3641,3089) ; R20.2@3608,3063.22 ccw(c3608,3080.64) 3620.32,3068.32 ; R20.2@3619.25,3051.97 cw(c3656.14,3051.97) 3630.05,3078.05 ; v1@3635.5,3089 cw(c3622.22,3089) 3631.61,3079.61 cw(c3641,3070.22) v1@3641,3083.5
  Bottom Layer w9: v1(3641,3089) 3817,3089 3890,3016 U3.55 ; v1@3644.89,3085.11 cw(c3654.28,3075.72) 3654.28,3089 cw(c3654.28,3102.28) v1@3644.89,3092.89
NetU2_3: U2.3 U3.35 | length 304.6
  Bottom Layer w9: U3.35 3600.09,3258.09 3632,3290 3692,3290 ; U2.3@3700.44,3327.57 cw(c3666.56,3315.44) 3692,3290 ; 3702.05,3300.05 ccw(c3681.36,3320.74) U2.3@3708.91,3330.6 ; 3705.17,3303.17 cw(c3724,3284.35) U2.3@3724,3310.97 ; U2.3@3711,3323 U2.3 ; U2.3@3717,3315 3692,3290
NetU2_4: U2.4 U3.34 | length 302.8
  Bottom Layer w9: U3.34 3580.41,3292.41 U2.4 ; U2.4@3598.97,3336 cw(c3538.55,3336) 3581.28,3293.28 cw(c3624,3250.55) U2.4@3624,3310.97 ; U2.4@3607.97,3336 cw(c3569.28,3336) 3596.64,3308.64 cw(c3624,3281.28) U2.4@3624,3319.97
NetU2_5: U2.5 U3.33 | length 266.2
  Bottom Layer w9: U2.5 3560.72,3299.28 ; U2.5@3525.8,3320.07 cw(c3528.78,3293.75) 3547.52,3312.48 cw(c3566.25,3331.22) U2.5@3539.93,3334.2 ; U2.5@3526.82,3311.13 cw(c3531.47,3270.02) 3560.72,3299.28 ; U2.5@3548.87,3333.18 ccw(c3589.98,3328.53) 3560.72,3299.28 ; U3.33 3560.72,3299.28
NRST: C11.2 P5.2 R12.1 R.1 U3.7 | length 1564
  Top Layer w8: v1@3910,2744 v1(3916,2744) ; v1@3914.59,2749.83 ccw(c3909.78,2769.77) 3927.28,2759.07 ; v1@3916,2750 ccw(c3916,2764.49) 3926.24,2754.24 ccw(c3936.49,2744) v1@3922,2744 ; v1@3918,2746 3970,2798 ; v1@3921.32,2749.32 ccw(c3875.6,2795.03) R12.1@3940.25,2795.03 ; v1@3921.83,2745.41 cw(c3930.06,2747.39) 3922.84,2751.81 ; 3934.97,2762.97 ccw(c3902.91,2795.03) R12.1@3948.25,2795.03 ; 3948.63,2776.63 ccw(c3930.23,2795.03) R12.1@3956.25,2795.03 ; R12.1@3960.31,2790.66 cw(c3978.02,2772.94) 3978.02,2798 ; R12.1@3960.31,2807.28 ccw(c3982.7,2829.67) 3982.7,2798 ; R12.1@3962.36,2793.42 cw(c3970,2789.33) 3970,2798 ; R12.1@3963.07,2802.89 ccw(c3970,2805.35) 3970,2798 ; C11.2@4019.69,2789.69 ccw(c3999.64,2769.64) 3999.64,2798 ccw(c3999.64,2826.36) C11.2@4019.69,2806.31 ; C11.2@4028,2784.28 cw(c4028,2751.17) 4051.42,2774.58 ; C11.2@4039.75,2796.03 ccw(c4063.36,2796.03) 4046.66,2779.34 ; P5.2 4266.69,2480.68 4383,2597 4383,2735 4342.69,2775.32 R.1@4322.8,2775.32 ; R.1@4165.31,2775.32 4158.28,2768.28 4057.72,2768.28 C11.2 3970,2798 ; R.1@4336.57,2763.57 cw(c4336.57,2720.45) 4367.06,2750.94 ; R.1@4336.57,2771.57 cw(c4336.57,2747.77) 4353.4,2764.6 ; R.1@4348.32,2775.32 ccw(c4361.93,2775.32) 4352.31,2765.69
  Bottom Layer w8: U3.7 3737.89,2805.89 3769,2837 3847,2837 3916,2768 v1(3916,2744) ; v1@3911.76,2748.24 ccw(c3901.51,2758.49) 3916,2758.49 ccw(c3930.49,2758.49) v1@3920.24,2748.24
PA9: pad.0@4245,3321 U3.42 | length 586
  Bottom Layer w9: U3.42 3737.89,3260.89 3771,3294 3806.56,3294 ; 3806.59,3293.97 4217.97,3293.97 pad.0@4245,3321
PA10: pad.1@4245,3174.67 U3.43 | length 710.2
  Bottom Layer w9: U3.43 3757.57,3248.57 3779,3270 4144,3270 pad.1@4241,3173 ; 4192.6,3221.4 ccw(c4245,3273.8) pad.1@4245,3199.69 ; 4206.28,3207.72 cw(c4173.23,3174.67) pad.1@4219.97,3174.67 ; 4207.97,3206.03 ccw(c4245,3243.07) pad.1@4245,3190.69
VCC: C2.1 C12.2 C13.2 D1.2 R3.2 R4.2 R5.2 R6.2 R7.2 R8.2 U4.3 | length 4287.5
  Top Layer w15: v1(3158,3267) 3206,3267 C2.1 3208,3256 R7.2 3411,3053 R8.2
  Top Layer w30: D1.2@4036.39,2314.61 ccw(c4010.79,2340.21) 4047,2340.21 ccw(c4083.21,2340.21) D1.2@4057.61,2314.61 ; v1(4044,2376) 4047,2373 D1.2
  Top Layer w40: U4.3 3716.32,2231.68 3715,2233 3767,2285 C12.2 3847.94,2274.06 C13.2 4027.06,2274.06 D1.2 ; C12.2@3840.54,2283.54 ccw(c3863.4,2306.4) 3863.4,2274.06 ; 3998.87,2274.06 ccw(c3998.87,2332.13) D1.2@4039.93,2291.07
  Top Layer w50: v1(4010,2376) v1(4044,2376) ; v1(4010,2402) v1(4044,2402)
  Bottom Layer w15: 3086.5,3264.5 3089,3267 v1(3158,3267)
  Bottom Layer w30: 3086.5,3264.5 3054,3232 3054,2559 3170.52,2442.48 3353.57,2442.48 3375.05,2421 3988,2421 v1@4010,2399 ; 3089,3267 3280,3458 3502,3458 3563,3519 3563,3768 3619,3824 v2(3635,3824) ; 3582.08,3787.08 cw(c3635,3734.16) R3.2@3635,3809 ; 3604.96,3800.95 ccw(c3592.16,3848.73) v2(3635,3824) ; 3607.69,3812.69 cw(c3635,3785.37) v2(3635,3824) ; v2(3815,3824) v2(3635,3824) ; v1@4002.27,2406.73 cw(c3971.54,2376) v1@4015,2376 ; v1(4010,2376) v1@4010,2399 ; v1@4014.55,2373.93 ccw(c3994.18,2383.18) v1@4010,2399
  Bottom Layer w50: v1(4010,2376) v1(4044,2376) ; v1(4010,2402) v1(4044,2402)
VCC3.3: C1.1 C3.1 C6.2 C7.2 C8.2 C9.2 C14.2 C15.2 C18.2 Gre.1 L1.2 pad.3 R1.1 R2.1 R12.2 R13.2 R14.2 R15.2 R16.2 RED.1 U1.3 U2.2 U3.19 U3.32 U3.48 U3.64 U4.2 | length 9347.6
  Top Layer w9: C8.2 3253.43,2909 3307,2909 3360,2856 v1(3551,2856) ; C8.2@3213.85,2882.64 ccw(c3213.85,2914.54) 3236.41,2891.98 ; C7.2 3213.85,2957.85 v1(3247,2991) ; C7.2@3213.85,2964.5 ccw(c3213.85,2980.54) 3225.2,2969.19 ; C6.2 3213.85,3041.85 v1(3247,3075) ; C6.2@3213.85,3046.36 ccw(c3213.85,3057.23) C6.2@3221.54,3049.54 ; C6.2@3216.1,3035.11 cw(c3237.8,3035.11) C6.2@3222.46,3050.46 ; C8.2@3225.1,2871.39 cw(c3247.5,2871.39) 3231.66,2887.23 ; C7.2@3225.1,2953.25 cw(c3263.36,2953.25) 3236.31,2980.31 ; C6.2@3225.1,3035.11 cw(c3268.53,3035.11) 3237.82,3065.82 ; 3233.39,3058.16 cw(c3254.83,3045.78) v1@3248.42,3069.69 ; 3236.85,3064.14 cw(c3246.17,3058.76) v1@3246.72,3069.51 ; v1@3241.5,2991 cw(c3228.22,2991) 3237.61,2981.61 cw(c3247,2972.22) v1@3247,2985.5 ; v1@3241.5,3075 cw(c3228.22,3075) 3237.61,3065.61 cw(c3247,3056.22) v1@3247,3069.5 ; v1@3547.11,2852.11 ccw(c3537.72,2842.72) 3537.72,2856 ccw(c3537.72,2869.28) v1@3547.11,2859.89
  Top Layer w10: 3141,2667 3165,2691 ; 3141,2828 3182.42,2869.42 C8.2 ; 3141,2924 3168.28,2951.28 C7.2 ; 3141,2999 3175.14,3033.14 C6.2 ; 3141,3049 3147.85,3049 C9.2 3213.85,3123.85 v1(3243,3153) ; L1.2@3181.52,2681.28 ccw(c3165,2672.1) 3165,2691 ; L1.2@3181.52,2700.72 cw(c3165,2709.9) 3165,2691 ; 3192.14,3093.29 cw(c3213.85,3071.58) C9.2@3213.85,3102.28 ; 3196.89,3098.04 ccw(c3181.91,3113.03) C9.2@3203.1,3113.03 ; L1.2 3165,2691 ; C8.2@3206.25,2861.82 ccw(c3187.9,2843.47) 3187.9,2869.42 ccw(c3187.9,2895.37) C8.2@3206.25,2877.02 ; C7.2@3206.25,2943.68 ccw(c3187.9,2925.33) 3187.9,2951.28 ccw(c3187.9,2977.23) C7.2@3206.25,2958.88 ; C6.2@3206.25,3025.54 ccw(c3187.9,3007.19) 3187.9,3033.14 ccw(c3187.9,3059.09) C6.2@3206.25,3040.74 ; C9.2@3224.6,3116.97 cw(c3267.16,3116.97) v1@3237.06,3147.06 ; 3232.46,3139.09 cw(c3249.34,3129.35) v1@3244.29,3148.17 ; v1@3238,3153 cw(c3225.93,3153) 3234.46,3144.46 cw(c3243,3135.93) v1@3243,3148 ; R1.1 C1.1 ; R1.1@3635.6,3436.4 cw(c3653.95,3418.05) 3653.95,3444 cw(c3653.95,3469.95) R1.1@3635.6,3451.6 ; U1.3 3661.54,3603.63 3698,3567.17 C1.1 ; 3654,3400 3674,3380 3674,3239 ; U1.3@3667.68,3603.63 ccw(c3682.51,3603.63) 3672.03,3593.14 ; C1.1@3690.4,3436.4 ccw(c3672.05,3418.05) 3672.05,3444 ccw(c3672.05,3469.95) C1.1@3690.4,3451.6 ; C1.1@3690.4,3453.57 ccw(c3672.05,3471.92) 3698,3471.92 ccw(c3723.95,3471.92) C1.1@3705.6,3453.57 ; C1.1@3693.37,3432.33 cw(c3689.88,3425) 3698,3425 ; C1.1@3698.75,3442.03 ccw(c3741.67,3442.03) 3711.32,3411.68 ; C3.1@3699.42,3230.6 cw(c3695.06,3260.05) 3674,3239 ; C3.1@3701,3230.72 ccw(c3701,3273.49) 3731.24,3243.24 ; C1.1@3702.63,3432.33 ccw(c3706.12,3425) 3698,3425 ; C1.1@3708.75,3442.03 ccw(c3775.81,3442.03) 3728.39,3394.61 ; U2.2@3799.47,3336 cw(c3740.26,3336) 3782.13,3294.13 cw(c3824,3252.26) U2.2@3824,3311.47 ; U2.2@3809.47,3336 cw(c3774.4,3336) 3799.2,3311.2 cw(c3824,3286.4) U2.2@3824,3321.47 ; 3819.29,3422.29 cw(c3841,3400.58) R2.1@3841,3431.28 ; U2.2 3706,3218 C3.1 3695,3218 3674,3239 ; 3824.04,3427.04 ccw(c3809.06,3442.03) R2.1@3830.25,3442.03 ; R2.1 3790,3393 3730,3393 3698,3425 ; R12.2 3886,2810 3924,2848 v2(4106,2848) v2@4107,2849 ; R12.2@3886.75,2798.97 cw(c3915.19,2798.97) 3895.08,2819.08 ; R12.2@3896.75,2798.97 cw(c3949.33,2798.97) 3912.15,2836.15 ; 3898.63,2619.63 cw(c3926.73,2591.54) Gre.1@3933.52,2630.69 ; 3902.61,2623.61 ccw(c3881.23,2645) Gre.1@3911.47,2645 ; Gre.1@3931.81,2620.83 ccw(c3922.7,2568.3) 3885,2606 3924,2645 Gre.1 ; v2@4098.93,2840.93 ccw(c4081.86,2823.86) 4081.86,2848 ccw(c4081.86,2872.14) v2@4098.93,2855.07 ; 3698,3425 C1.1
  Top Layer w15: C15.2 3474,2542 3510,2578 ; C15.2@3481.44,2526.55 cw(c3515.31,2534.2) 3490.76,2558.76 ; C15.2@3496.07,2529.86 cw(c3546.7,2541.29) 3510,2578 ; 3570.28,2602.28 ccw(c3527.55,2645) RED.1@3587.97,2645 ; 3577.52,2609.52 cw(c3610,2577.04) RED.1@3610,2622.97 ; RED.1 3610,2642 3546,2578 ; 3804.56,2545.44 ccw(c3822,2562.88) 3822,2538.22 ccw(c3822,2562.88) 3839.44,2545.44 ; C18.2@3809.31,2540.69 cw(c3798.59,2529.97) C18.2@3813.75,2529.97 ; C18.2@3830.25,2529.97 cw(c3845.41,2529.97) C18.2@3834.69,2540.69 ; R12.2@3880.17,2789.2 cw(c3868.5,2777.53) 3885,2777.53 ; R12.2@3880.17,2804.8 ccw(c3866.09,2818.88) 3886,2818.88 ccw(c3905.91,2818.88) R12.2@3891.83,2804.8 ; R16.2@3880.17,2894.7 cw(c3866.09,2880.62) 3886,2880.62 cw(c3905.91,2880.62) R16.2@3891.83,2894.7 ; R16.2@3880.17,2910.3 ccw(c3866.09,2924.38) 3886,2924.38 ccw(c3905.91,2924.38) R16.2@3891.83,2910.3 ; R15.2@3880.17,3000.2 cw(c3866.09,2986.12) 3886,2986.12 cw(c3905.91,2986.12) R15.2@3891.83,3000.2 ; R15.2@3880.17,3015.8 ccw(c3866.09,3029.88) 3886,3029.88 ccw(c3905.91,3029.88) R15.2@3891.83,3015.8 ; R13.2@3880.17,3105.7 cw(c3866.09,3091.62) 3886,3091.62 cw(c3905.91,3091.62) R13.2@3891.83,3105.7 ; R13.2@3880.17,3121.3 ccw(c3866.09,3135.38) 3886,3135.38 ccw(c3905.91,3135.38) R13.2@3891.83,3121.3 ; R14.2@3880.17,3211.2 cw(c3866.09,3197.12) 3886,3197.12 cw(c3905.91,3197.12) R14.2@3891.83,3211.2 ; 3885,2772.7 cw(c3908.33,2772.7) R12.2@3891.83,2789.2 ; R12.2 3885,2796 3885,2606 3885,2591 C18.2 3772,2578 3546,2578 ; R12.2@3886,2810 R16.2 R15.2 R13.2 R14.2 ; 3510,2578 3546,2578
  Top Layer w20: v2@3596,3400 3654,3400 C1.1 ; v2@3599.54,3405.54 ccw(c3612.9,3418.9) 3612.9,3400 ; C1.1@3684.83,3430.83 cw(c3698,3417.65) C1.1@3698,3436.28
  Top Layer w30: v2(3172,3156) 3141,3125 3141,3049 3141,2999 3141,2924 3141,2828 3141,2667 3141,2632 3171,2602 3398,2602 C15.2 ; 3448.39,2551.61 cw(c3422.79,2526) C15.2@3459,2526
  Top Layer w40: C15.2 C14.2 3595.06,2420.44 3626.16,2389.35 U4.2@3626.16,2161 ; 3595.06,2487.42 ccw(c3706.51,2487.42) U4.2@3627.71,2408.61 ; U4.2@3606.89,2370.08 cw(c3560.38,2323.57) 3626.16,2323.57 cw(c3691.93,2323.57) U4.2@3645.42,2370.08
  Bottom Layer w9: v1(3243,3153) 3263,3173 3524,3173 3574,3123 3814,3123 3856,3165 U3.48 ; v1@3243,3158.5 ccw(c3243,3171.78) 3252.39,3162.39 ccw(c3261.78,3153) v1@3248.5,3153 ; v1(3247,2991) 3320,2991 3432.8,2878.2 U3.19 ; v1(3247,3075) 3349,3075 3408.11,3134.11 U3.32 ; v1@3250.89,2987.11 cw(c3260.28,2977.72) 3260.28,2991 cw(c3260.28,3004.28) v1@3250.89,2994.89 ; v1@3250.89,3071.11 cw(c3260.28,3061.72) 3260.28,3075 cw(c3260.28,3088.28) v1@3250.89,3078.89 ; v1(3551,2856) 3578,2883 3828,2883 3872.17,2838.83 U3.64 ; v1@3551,2861.5 ccw(c3551,2874.78) 3560.39,2865.39 ccw(c3569.78,2856) v1@3556.5,2856
  Bottom Layer w10: v2(4106,2848) 4211,2848 ; v2@4113.07,2840.93 cw(c4130.14,2823.86) 4130.14,2848 cw(c4130.14,2872.14) v2@4113.07,2855.07 ; pad.3@4220.78,2878.14 cw(c4186.35,2872.65) 4211,2848 ; pad.3@4241.14,2857.78 ccw(c4235.65,2823.35) 4211,2848 ; pad.3 4211,2848
  Bottom Layer w30: v2(3172,3156) 3416,3400 3594,3400 v2(3596,3402)
VDD3.3: 
pads on no net: K2.3 P5.0 U1.1 U1.2 U3.1 U3.2 U3.3 U3.4 U3.8 U3.9 U3.10 U3.11 U3.20 U3.21 U3.22 U3.24 U3.25 U3.26 U3.27 U3.29 U3.30 U3.36 U3.38 U3.39 U3.40 U3.41 U3.44 U3.46 U3.49 U3.50 U3.51 U3.52 U3.53 U3.54 U3.57 U3.58 U3.59 U3.61 U3.62

## Polygon pours and split planes (outlines as drawn)
no net on Bottom Layer "GND" (solid, remove dead copper, pour order 6): 2615,4017 2658,4060 5333,4060 5333,2057 4862,1586 4764,1684 2823,1684

## Keep-outs
Keep-Out Layer:
  lines w6: 3105.74,2011 4345.26,2011 ; 3105.74,2011.26 cw(c3105.74,2090) 3027,2090 3027,3449 cw(c3105.74,3449) 3105.74,3527.74 ; 3105.74,3528 3512,3528 ; 3512,3528.36 3512,3898 3932,3898 ; 3934,3528 4345,3528 cw(c4345,3449.26) 4423.74,3449.26 ; 3934,3529.36 3934,3564.36 3934,3898 ; 4345.26,2011.26 ccw(c4345.26,2090) 4424,2090 4424,3449.26

## Silkscreen, mask and mechanical layers (free items; w line width, h text height)
Top Overlay:
  text "SHIFT" at 4273,2612 h50
  text "+" at 4328,2566 h50
  text "-" at 4327,2520 h50
  text "OK" at 4314,2473 h50
  text "RESET" at 4281,2419 h50
  text "GND" at 4306,2363 h50

## Dimensions
3027,2090 to 4424,2090 on Top Overlay
3932,3898 to 4345.26,2011 on Top Overlay